# Altium PCB ring_pcb.PcbDoc
Units mm, origin at the board's own origin, x right, y up, seen from the top; angles counter-clockwise.
Board outline 125 x 125 mm, 2 copper layers (Top Layer, Bottom Layer); 6 components, 2 nets, 12 pads, 0 vias.
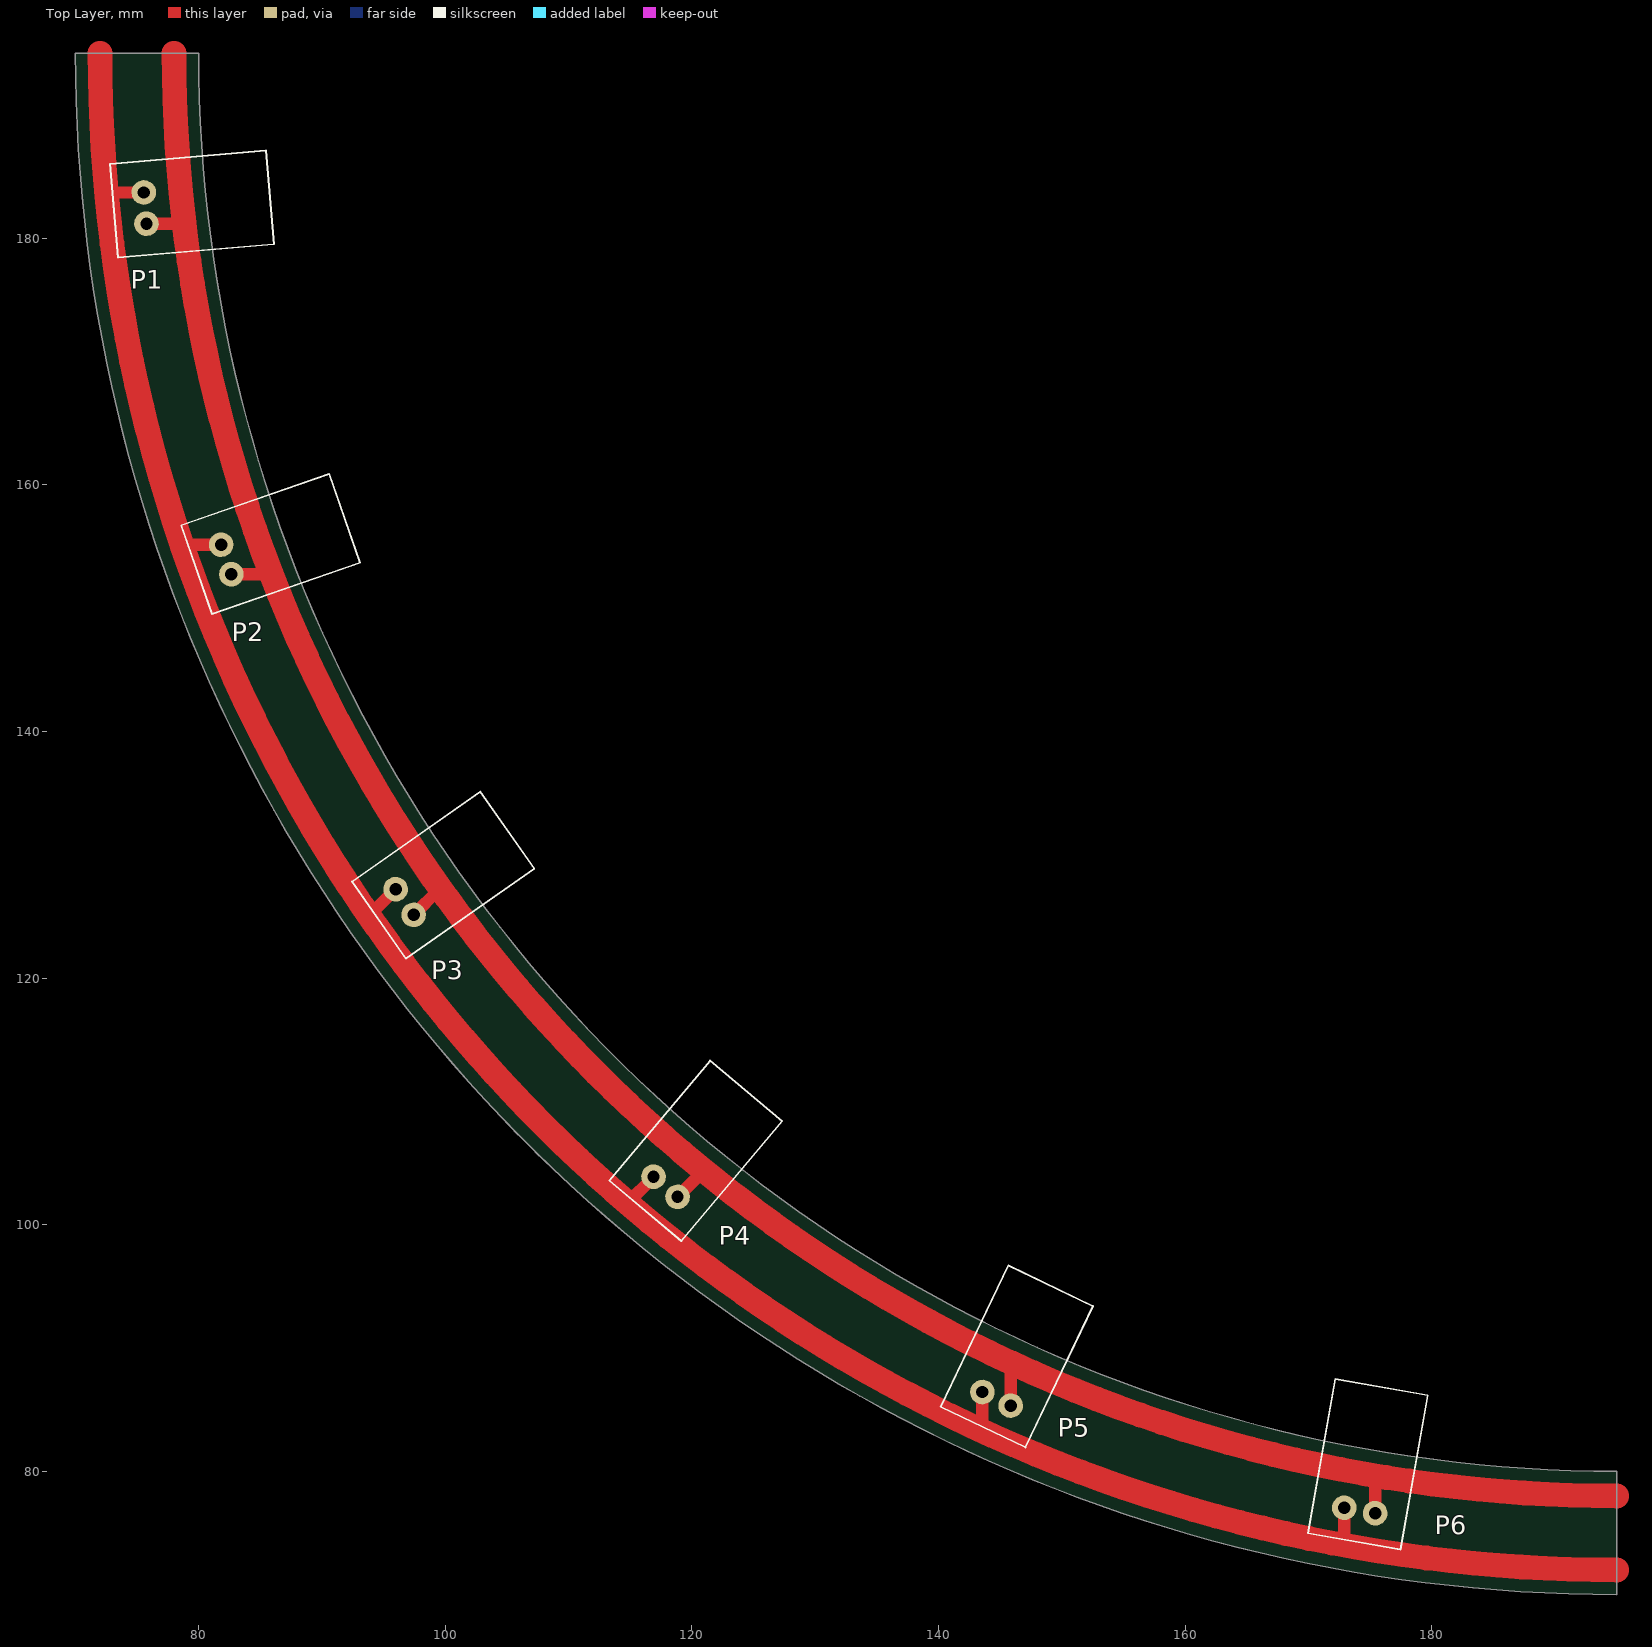
[diagram p0: Top Layer view]
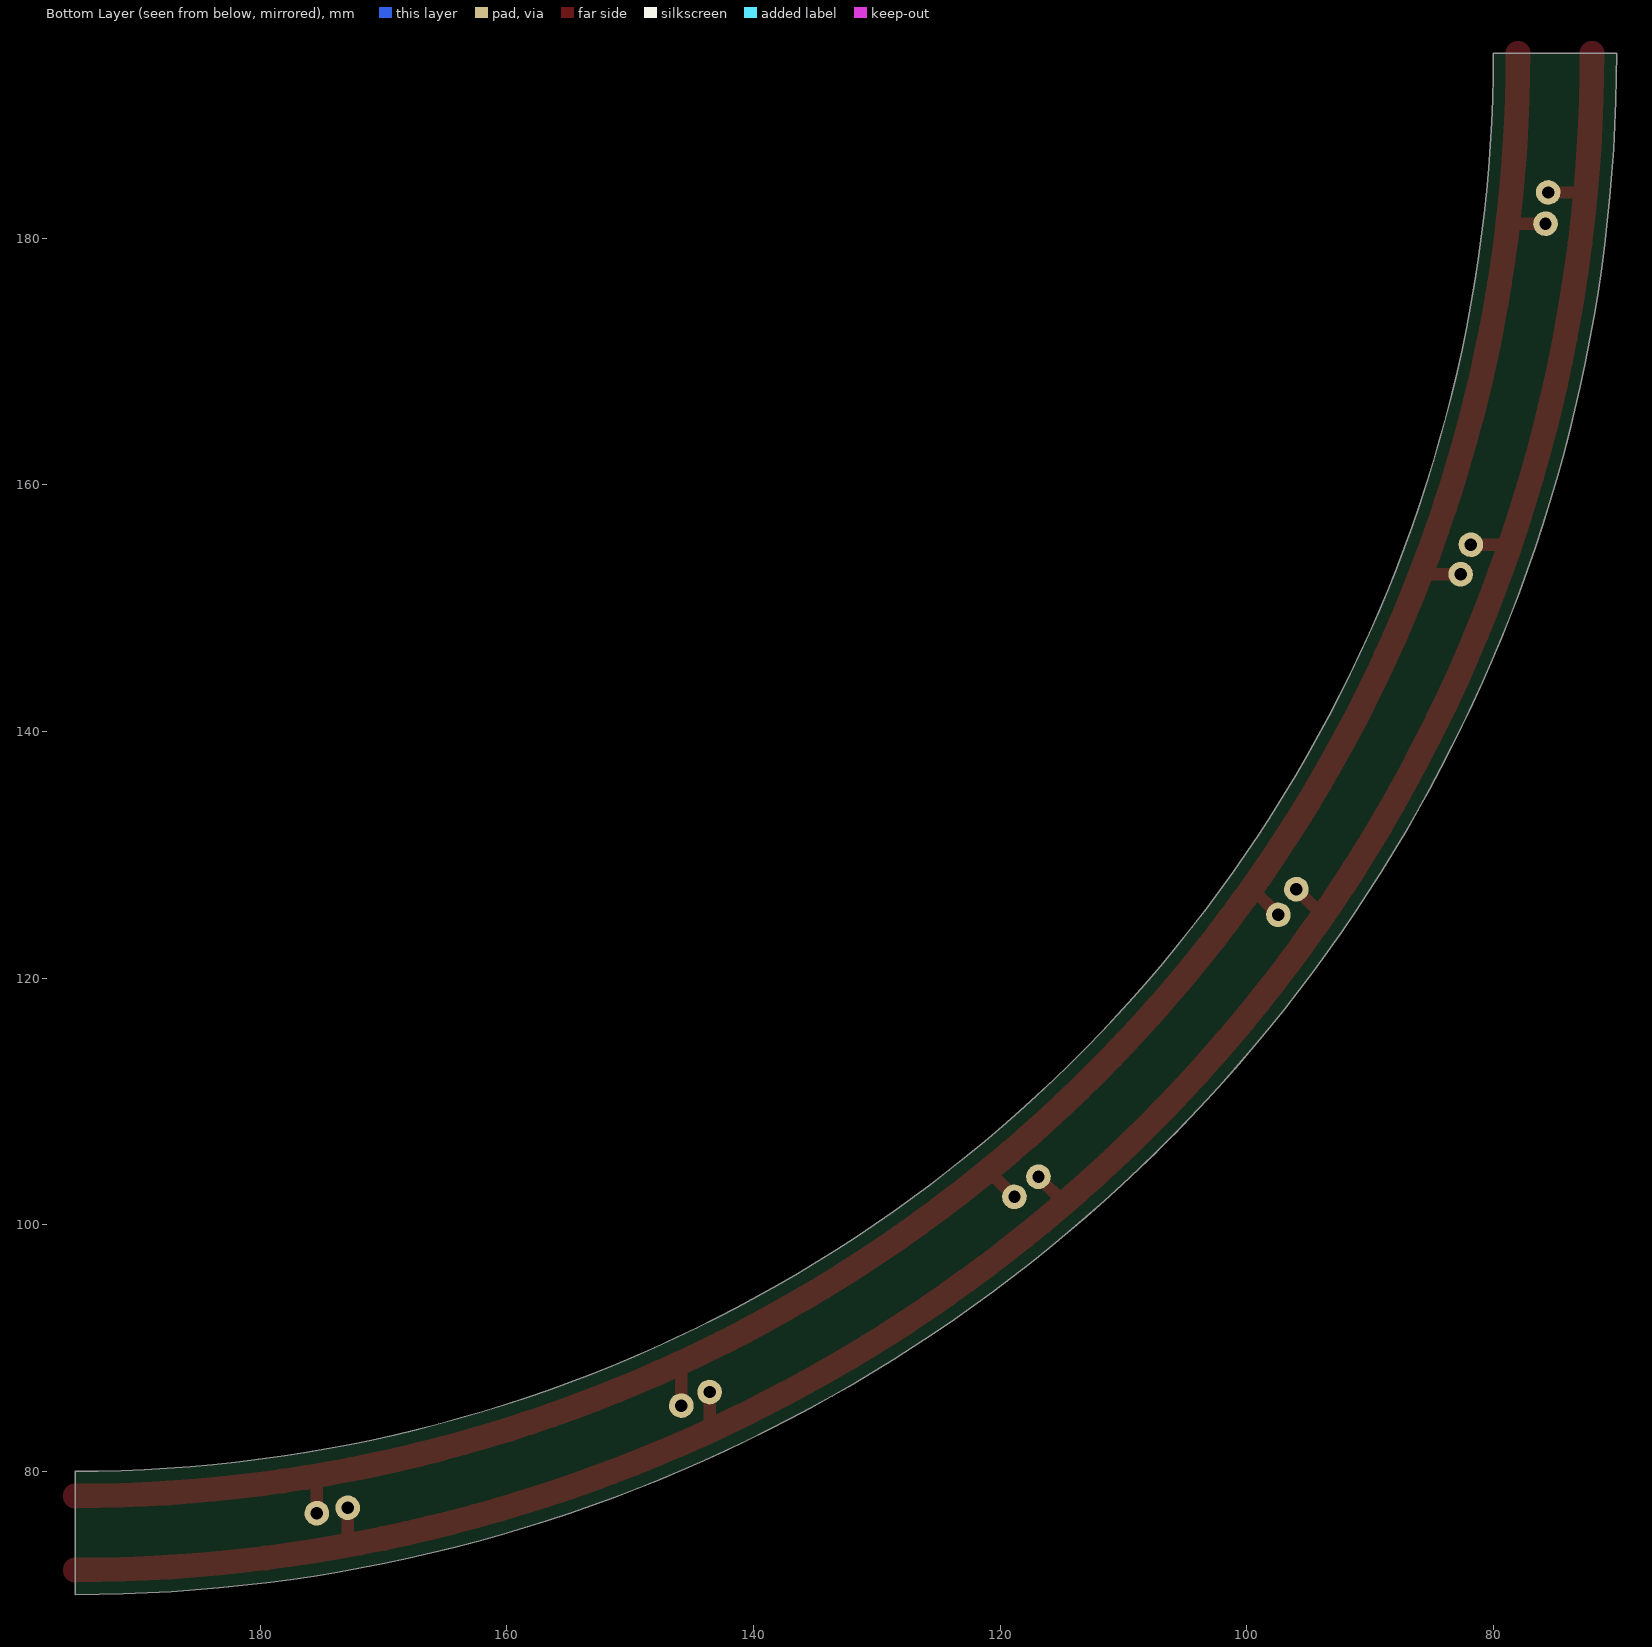
[diagram p1: Bottom Layer view, seen from below]
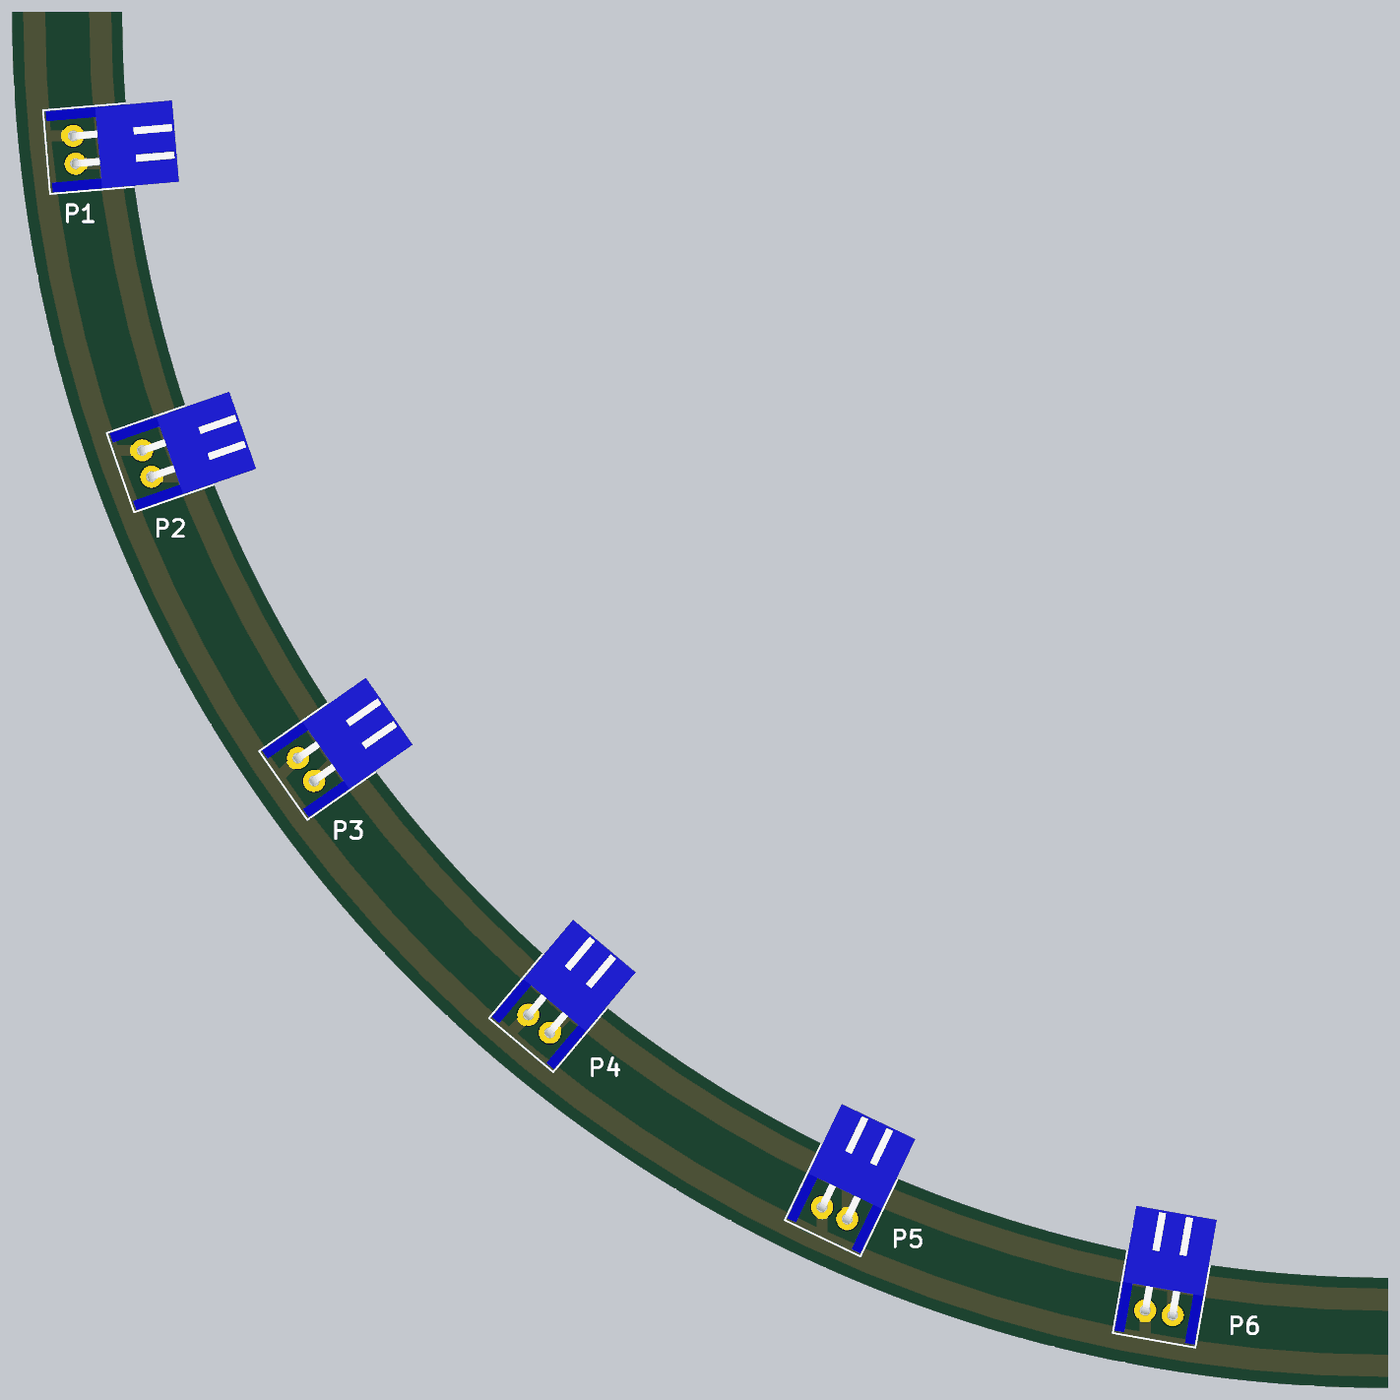
[diagram p2: 3D render of the assembled board from above, using the file's embedded part models]

## Layer stack, top to bottom
Top Solder: solder mask 0.0102, Solder Resist, Dk 3.5
Top Layer: signal copper 0.0356
Dielectric 1: dielectric 0.32, FR-4, Dk 4.8
Bottom Layer: signal copper 0.0356
Bottom Solder: solder mask 0.0102, Solder Resist, Dk 3.5

## Board outline
195,70 cw(c195,195) 70,195 80,195 ccw(c195,195) 195,80

## Design rules (kind name [scope] priority, off if disabled: settings)
Clearance [All] p1: gap=0.3 ignorepadtopadclearanceinfootprint=FALSE except(0: Arc-Hole Track-Hole SMDPad-Hole THPad-Hole Via-Hole Fill-Hole Poly-Hole Region-Hole Text-Hole; 0.2: Arc-Text Track-Text SMDPad-Text THPad-Text Via-Text Fill-Text Poly-Text Region-Text Text-Text)
HoleSize [All] p1: absolutevalues=TRUE maxlimit=4 minlimit=0.1 maxpercent=80.000 minpercent=20.000
HoleToHoleClearance [All] p1: gap=0.3 allowstackedmicrovias=TRUE
PlaneClearance [All] p1: clearance=0.5
PlaneConnect [All] p1: planeconnectstyle=Relief reliefexpansion=0.5 reliefentries=4 reliefconductorwidth=0.3 reliefairgap=0.2
PolygonConnect [All] p1: connectstyle=Relief reliefconductorwidth=0.3 reliefentries=4 polygonreliefangle="90 Angle" airgapwidth=0.2
RoutingCorners [All] p1: cornerstyle=45-Degree minsetback=2 maxsetback=2
RoutingVias [All] p1: holewidth=0.3 width=1 viastyle="Through Hole" minholewidth=0.3 minwidth=1 maxholewidth=0.3 maxwidth=1
SMDEntry [All] p1: side=TRUE corner=TRUE anyangle=FALSE
SMDNeckDown [All] p1: percent=50.000
SilkToSilkClearance [All] p1: silktosilkclearance=0.2
SolderMaskExpansion [All] p1: expansion=0.102
UnConnectedPin [All] p1:
UnRoutedNet [All] p1: checkbadconnections=TRUE
Width [All] p1: maxlimit=3 minlimit=0.15 preferedwidth=0.2
23 further rules are at their usual default settings.

## Components (designator, comment, footprint, x,y, rotation, side; value= is the part's Value field where it differs from the comment)
P1 "S2B-XH-A" S2B-XH-A 75.657,182.457 r274.84 top locked
P2 "S2B-XH-A" S2B-XH-A 82.237,153.958 r289.14 top locked
P3 "S2B-XH-A" S2B-XH-A 96.702,126.171 r305.04 top locked
P4 "S2B-XH-A" S2B-XH-A 117.865,103.075 r320 top locked
P5 "S2B-XH-A" S2B-XH-A 144.708,85.879 r334.39 top locked
P6 "S2B-XH-A" S2B-XH-A 174.162,76.823 r350 top locked

## Footprints (in the part's own frame and the unit in brackets; to place one, negate y for a bottom-side part, rotate by r counter-clockwise, add the part's x,y. Pads: shape width x height; smd on the part's side, far side on the other; paste and mask are expansions set on the pad)
S2B-XH-A [mm]
  round 2 hole 1: 1(-1.27,0) 2(1.27,0)
  silkscreen extent -3.81,-2.54 3.81,10.16, body extent -3.7,-2.3 3.7,9.2, height 5.95

## Part data
P1 P2 P3 P4 P5 P6: "JST pin header, 2.54 mm pitch, angled"

## Nets (pads, with @x,y where several pads share a name; then routed paths per layer and width w, separated by ;. In a path a pad name is that pad's centre, name@x,y a point inside that pad or via, vN(x,y) a via of type N, cw(c..) or ccw(c..) an arc to the next point about the centre after c; other vN are vias at no path point)
GND: P1.2 P2.2 P3.2 P4.2 P5.2 P6.2 | length 203.6
  Top Layer w1: P1.2 78.641,181.191 78.799,181.35 ; P2.2 85.722,152.758 85.844,152.88 ; 84.986,155.091 84.986,155.176 ; P3.2 99.512,127.212 99.512,127.391 ; P4.2 120.894,104.314 120.894,104.461 ; P5.2 145.854,88.72 145.924,88.79 ; 147.972,87.449 147.972,87.867 ; 175.287,79.673 175.413,79.547 P6.2 ; 177.908,79.098 177.908,79.255
  Top Layer w2: 78,195 ccw(c195,195) 195,78
Vcc: P1.1 P2.1 P3.1 P4.1 P5.1 P6.1 | length 212.7
  Top Layer w1: 72.526,183.638 72.609,183.722 P1.1 ; 78.632,155.157 P2.1 ; 79.418,152.932 79.595,152.932 ; 93.754,125.155 93.917,125.155 P3.1 ; 114.792,101.749 116.893,103.85 P4.1 ; 141.66,84.168 141.66,84.525 ; P5.1 143.563,83.293 143.602,83.253 ; 170.688,74.427 170.688,74.82 ; 172.796,74.021 172.912,74.136 P6.1
  Top Layer w2: 72,195 ccw(c195,195) 195,72

## Silkscreen, mask and mechanical layers (free items; w line width, h text height)
Mechanical 3:
  the board outline again, w0.5